# EAGLE board Biov4_LCD_v0_1_pan (EAGLE 7.5.0)
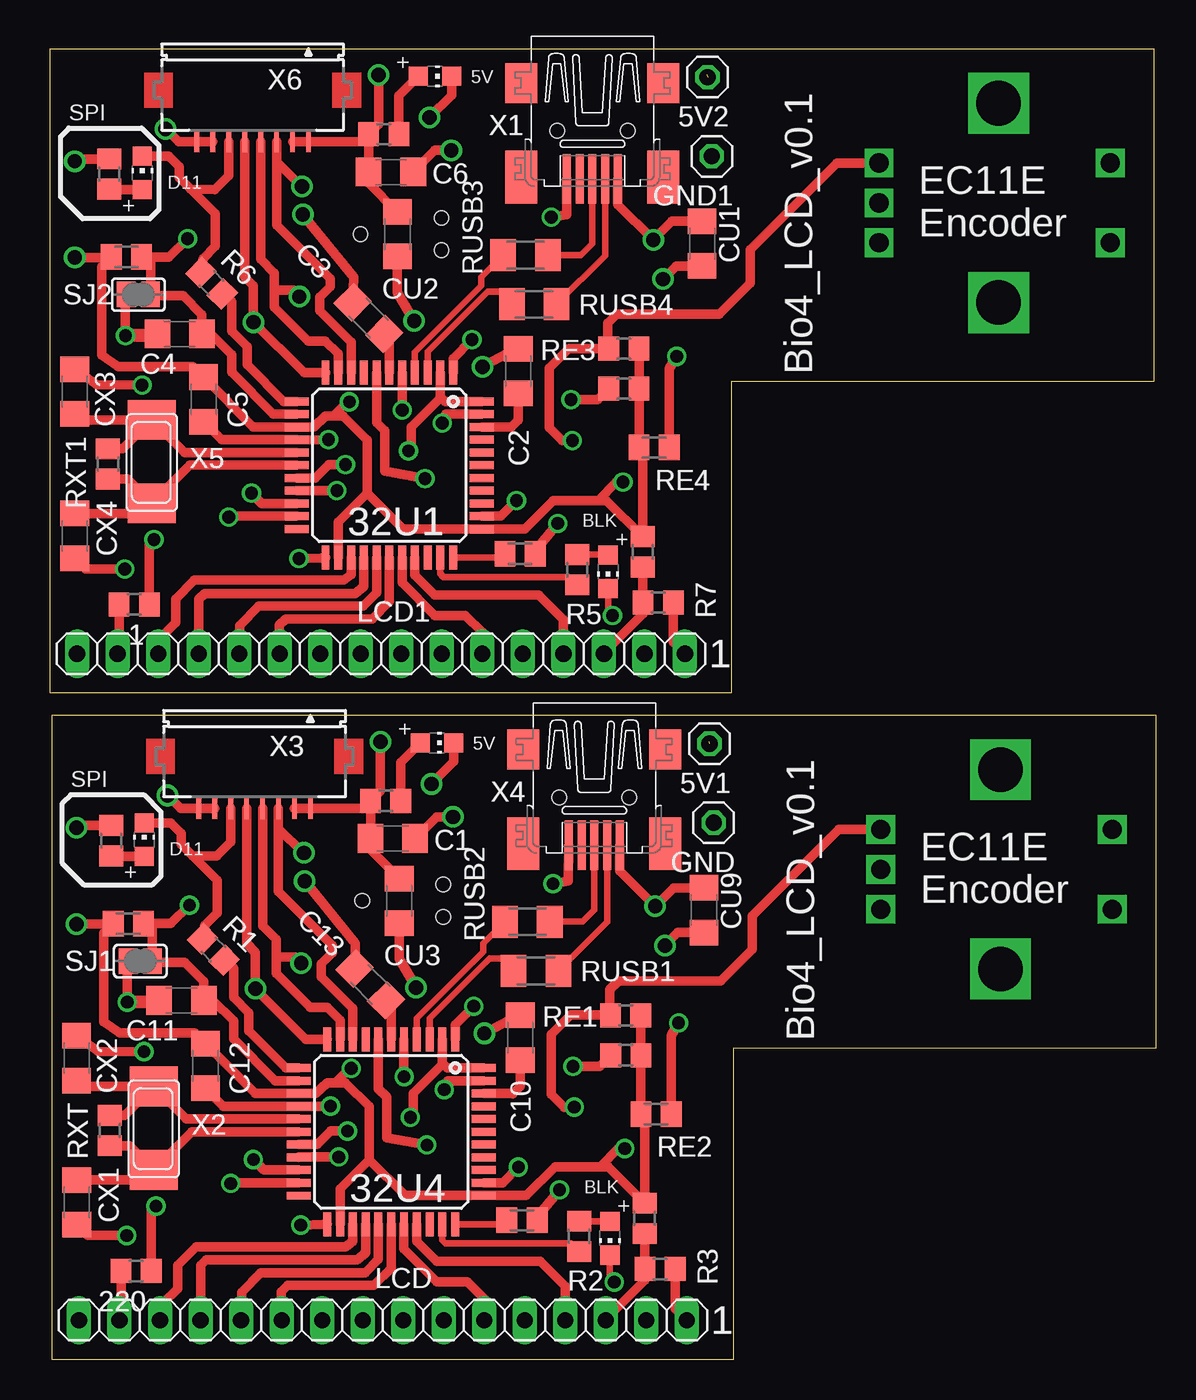
[diagram p0: board, top side]
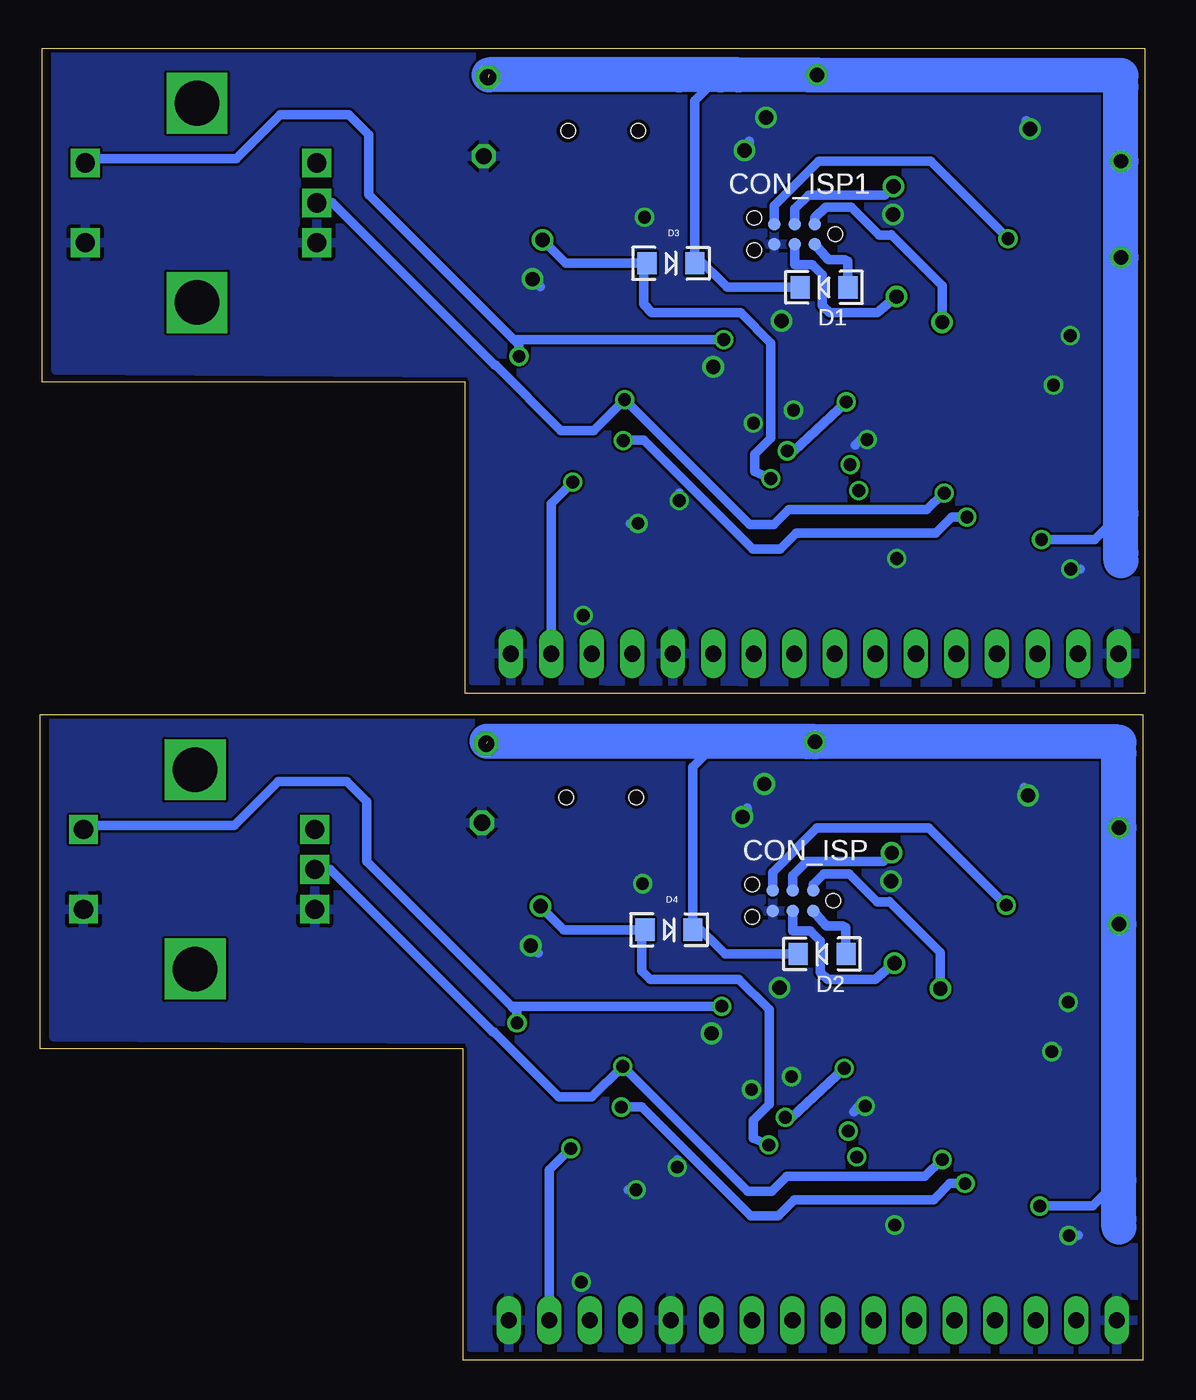
[diagram p1: board, bottom side, seen from below]

Size 69.27 x 82.2 mm. Coordinates in mm from the lower left corner, seen from the top.
Outline: 42.78,0 0.12,0 0.12,40.41 69.27,40.41 69.27,19.52 42.78,19.52 42.78,0
Outline: 42.66,41.79 0,41.79 0,82.2 69.15,82.2 69.15,61.31 42.66,61.31 42.66,41.79
Copper layers (1*2*15*16): Top 0.035mm / dielectric 0.2mm / layer 2 0.0175mm / dielectric 1.1mm / layer 15 0.0175mm / dielectric 0.2mm / Bottom 0.035mm
Design rules "SeeedStudio_DRU_no_angle_20130527": minimum track width 6mil, minimum drill 12mil, track to track 6mil, track to pad 6mil, pad to pad 6mil, via to via 6mil, smd to smd 0mil, copper to edge 10mil, drill to drill 10mil, minimum pad ring 6mil, minimum via ring 6mil, stop-mask expansion 2mil, vias tented up to drill 25mil, thermal gap 10mil
Net classes: 0 default: width 0.203 mm; 1 power: width 0.203 mm, drill 0.305 mm, clearance 0.152 mm; 2 VIN: width 0.457 mm; 3 fine: width 0.254 mm; 4 aref: width 0.356 mm
vRestrict: area 8.8,33.5 to 16.9,37.3; area 8.7,75.3 to 16.8,79.1

## Footprints (pad centres in the part's own frame; a part is rotated, then mirrored left to right if it is on the bottom)
R0805 = smd 1.3 x 1.5: 1 -0.95,0; 2 0.95,0
1X01 = drill 1.016 octagon: 1 0,0
TQFP44 = smd 1.5 x 0.5: 1 -5.8,4; 2 -5.8,3.2; 3 -5.8,2.4; 4 -5.8,1.6; 5 -5.8,0.8; 6 -5.8,0; 7 -5.8,-0.8; 8 -5.8,-1.6; 9 -5.8,-2.4; 10 -5.8,-3.2; 11 -5.8,-4; 23 5.8,-4; 24 5.8,-3.2; 25 5.8,-2.4; 26 5.8,-1.6; 27 5.8,-0.8; 28 5.8,0; 29 5.8,0.8; 30 5.8,1.6; 31 5.8,2.4; 32 5.8,3.2; 33 5.8,4 | smd 0.5 x 1.5: 12 -4,-5.8; 13 -3.2,-5.8; 14 -2.4,-5.8; 15 -1.6,-5.8; 16 -0.8,-5.8; 17 0,-5.8; 18 0.8,-5.8; 19 1.6,-5.8; 20 2.4,-5.8; 21 3.2,-5.8; 22 4,-5.8; 34 4,5.8; 35 3.2,5.8; 36 2.4,5.8; 37 1.6,5.8; 38 0.8,5.8; 39 0,5.8; 40 -0.8,5.8; 41 -1.6,5.8; 42 -2.4,5.8; 43 -3.2,5.8; 44 -4,5.8
CHIP-LED0805 = smd 1.2 x 1.2: A 0,-1.05; C 0,1.05
C1206 = smd 1.6 x 1.8: 1 -1.4,0; 2 1.4,0
TC2030-MCP-NL = smd 0.787 x 0.787: 5V 1.27,0.635; GND 3.81,0.635; MISO 1.27,-0.635; MOSI 2.54,0.635; RESET 3.81,-0.635; SCK 2.54,-0.635 | hole 0.889: 0,0; 5.08,-1.016; 5.08,1.016
LED-1206 = smd 1.2 x 1.4: A -1.5,0; C 1.5,0
1X16 = drill 1.016 long: 1 -19.05,0; 2 -16.51,0; 3 -13.97,0; 4 -11.43,0; 5 -8.89,0; 6 -6.35,0; 7 -3.81,0; 8 -1.27,0; 9 1.27,0; 10 3.81,0; 11 6.35,0; 12 8.89,0; 13 11.43,0; 14 13.97,0; 15 16.51,0; 16 19.05,0
M0805 = smd 1.3 x 1.6: 1 -0.95,0; 2 0.95,0
M1206 = smd 1.6 x 2: 1 -1.4,0; 2 1.4,0
SJ = smd 1.168 x 1.6: 1 -0.762,0; 2 0.762,0
EC11E = drill 1.2 square: A -2.5,0; B 0,0; C 2.5,0; D -2.5,14.5; E 2.5,14.5 | drill 2.8 square: P$1 6.25,7.5; P$2 -6.25,7.5
32005-201 = smd 3.1 x 0.5: 1 3,1.6; 2 3,0.8; 3 3,0; 4 3,-0.8; 5 3,-1.6 | smd 2.5 x 2: M1 -3,-4.45; M2 -3,4.45 | smd 3.3 x 2: M3 2.9,4.45; M4 2.9,-4.45 | hole 0.9: 0,2.2; 0,-2.2
NX6035 = smd 2.5 x 3: P$1 2.665,0; P$2 -2.565,0
FH12-08S-1SH = smd 0.3 x 1.3: 1 -3.5,3.25; 2 -2.5,3.25; 3 -1.5,3.25; 4 -0.5,3.25; 5 0.5,3.25; 6 1.5,3.25; 7 2.5,3.25; 8 3.5,3.25

## Placement (x,y rotation side)
1  220  [R0805]  5.25,47.35 180 top
5V1  [1X01]  41.3,38.61 180 top
5V2  [1X01]  41.19,80.4 180 top
32U1  ATMEGA32U4  [TQFP44]  21.24,56.07 270 top
32U4  ATMEGA32U4  [TQFP44]  21.36,14.29 270 top
220  220  [R0805]  5.37,5.56 180 top
BKLD  RED  [CHIP-LED0805]  35.07,7.61 180 top
BKLD1  RED  [CHIP-LED0805]  34.95,49.4 180 top
C1  100nF  [C1206]  21.46,32.67 0 top
C2  100nF  [C1206]  29.32,61.98 90 top
C3  100nF  [C1206]  19.93,65.3 315 top
C4  100nF  [C1206]  8.1,64.31 180 top
C5  100nF  [C1206]  9.6,60.2 90 top
C6  100nF  [C1206]  21.34,74.46 0 top
C10  100nF  [C1206]  29.44,20.19 90 top
C11  100nF  [C1206]  8.21,22.52 180 top
C12  100nF  [C1206]  9.72,18.41 90 top
C13  100nF  [C1206]  20.05,23.52 315 top
CON_ISP  SPI  [TC2030-MCP-NL]  19.55,28.78 180 bottom
CON_ISP1  SPI  [TC2030-MCP-NL]  19.43,70.57 180 bottom
CU1  10uF  [C1206]  40.84,69.97 90 top
CU2  10uF  [C1206]  21.75,70.55 270 top
CU3  10uF  [C1206]  21.87,28.76 270 top
CU9  10uF  [C1206]  40.96,28.18 90 top
CX1  22pF  [C1206]  1.65,9.86 90 top
CX2  22pF  [C1206]  1.64,18.9 270 top
CX3  22pF  [C1206]  1.52,60.69 270 top
CX4  22pF  [C1206]  1.53,51.65 90 top
D1  1N581D1206  [LED-1206]  20.12,67.23 180 bottom
D2  1N581D1206  [LED-1206]  20.24,25.44 180 bottom
D3  1N581D1206  [LED-1206]  29.73,68.74 0 bottom
D4  1N581D1206  [LED-1206]  29.85,26.95 0 bottom
GND  [1X01]  41.57,33.66 180 top
GND1  [1X01]  41.45,75.45 180 top
LCD  [1X16]  20.84,2.47 180 top
LCD1  [1X16]  20.72,44.26 180 top
LDPW1  RED  [CHIP-LED0805]  24.11,80.46 270 top
LDPW5  RED  [CHIP-LED0805]  24.23,38.67 270 top
LDSLAVE  RED  [CHIP-LED0805]  5.88,32.6 0 top
LDSLAVE1  RED  [CHIP-LED0805]  5.76,74.39 0 top
R1  1k  [R0805]  10.21,25.71 315 top
R2  1k  [R0805]  33.13,7.73 90 top
R3  1k  [R0805]  38.21,5.68 0 top
R4  1k  [R0805]  20.89,76.82 0 top
R5  1k  [R0805]  33.01,49.52 90 top
R6  1k  [R0805]  10.1,67.5 315 top
R7  1k  [R0805]  38.09,47.47 0 top
R13  1k  [R0805]  21.01,35.04 0 top
RE1  5k  [R0805]  36.05,21.59 180 top
RE2  5k  [R0805]  36.06,19.09 180 top
RE3  5k  [R0805]  35.93,63.38 180 top
RE4  5k  [R0805]  35.94,60.88 180 top
RK1  10k  [R0805]  37.24,8.86 270 top
RK2  10k  [M0805]  37.96,15.39 180 top
RK3  10k  [M0805]  29.43,50.53 180 top
RK4  10k  [M0805]  4.76,69.13 180 top
RK5  10k  [R0805]  3.69,74.32 270 top
RK6  10k  [M0805]  4.88,27.34 180 top
RK7  10k  [M0805]  29.55,8.74 180 top
RK8  10k  [R0805]  37.12,50.65 270 top
RK9  10k  [M0805]  37.84,57.18 180 top
RK18  10k  [R0805]  3.81,32.54 270 top
RUSB1  22  [M1206]  30.43,24.38 0 top
RUSB2  22  [M1206]  29.89,27.45 0 top
RUSB3  22  [M1206]  29.77,69.24 0 top
RUSB4  22  [M1206]  30.31,66.16 0 top
RXT  1M  [R0805]  3.72,14.37 270 top
RXT1  1M  [R0805]  3.6,56.15 270 top
SJ1  [SJ]  5.63,24.98 0 top
SJ2  [SJ]  5.51,66.77 0 top
U$1  EC11E  [EC11E]  52.04,30.74 270 top
U$2  EC11E  [EC11E]  51.92,72.52 270 top
X1  MINI-USB  [32005-201]  33.97,77.04 270 top
X2  16MHz  [NX6035]  6.48,14.46 90 top
X3  FH12-08S-1SH  [FH12-08S-1SH]  12.79,37.81 180 top
X4  MINI-USB  [32005-201]  34.09,35.25 270 top
X5  16MHz  [NX6035]  6.36,56.25 90 top
X6  FH12-08S-1SH  [FH12-08S-1SH]  12.67,79.59 180 top

## Library data of the parts
1 220 C1-C6 C10-C13 CU1-CU3 CU9 CX1-CX4 R1-R3 R5-R7 RE1-RE4 RK1 RK5 RK8 RK18 RXT RXT1 = rcl
5V1 5V2 GND GND1 = Headerlibrary
32U1 32U4 BKLD BKLD1 LDPW1 LDPW5 LDSLAVE LDSLAVE1 = adafruit
CON_ISP CON_ISP1 D1-D4 LCD LCD1 U$1 U$2 X2 X5 = lpatiny
R4 R13 RK2-RK4 RK6 RK7 RK9 RUSB1-RUSB4 = resistor
SJ1 SJ2 = jumper
X1 X4 = con-cypressindustries; OC_FARNELL: unknown; OC_NEWARK: unknown
X3 X6 = con-hirose; OC_FARNELL: unknown; OC_NEWARK: unknown

## Nets
+5V/1 [fine]: 5V1.1 32U4.2 32U4.14 32U4.24 32U4.34 32U4.44 220.1 C1.1 C12.2 CU3.1 D2.C D4.C LCD.2 R13.1 RE1.1 RE2.1 RK1.1 RK2.2 RK6.2 RK18.1 X3.1 X3.2
+5V/2 [fine]: 1.1 5V2.1 32U1.2 32U1.14 32U1.24 32U1.34 32U1.44 C5.2 C6.1 CU2.1 D1.C D3.C LCD1.2 R4.1 RE3.1 RE4.1 RK4.2 RK5.1 RK8.1 RK9.2 X6.1 X6.2
A0: 32U4.36
A1: 32U4.37
A2: 32U4.38
A3: 32U4.39
A4: 32U4.40
A5: 32U4.41
A6: 32U4.25 LCD.14
A7: 32U1.38
A8: 32U1.39
A9: 32U1.40
A10: 32U1.41
A11: 32U1.37
A12: 32U1.36
A13: 32U1.25 LCD1.14
AREF: 32U4.42 C10.1
AREF1: 32U1.42 C2.1
CS_32U1: LDSLAVE1.C R6.1 X6.6
CS_32U4: LDSLAVE.C R1.1 X3.6
D5*: 32U4.31
D5*1: 32U1.31
D6*: 32U4.27 LCD.12
D6*1: 32U1.27 LCD1.12
D7*: 32U4.1 RK2.1 U$1.D
D7*1: 32U1.1 RK9.1 U$2.D
D8*: 32U4.28 LCD.11
D8*1: 32U1.28 LCD1.11
D9*: 32U4.29 LCD.6
D9*1: 32U1.29 LCD1.6
D10*: 32U4.30 LCD.4
D10*1: 32U1.30 LCD1.4
D11*: 32U4.12 R1.2
D11*1: 32U1.12 R6.2
D12*: 32U4.26 LCD.13
D12*1: 32U1.26 LCD1.13
D13*: 32U4.32 R2.1
D13*1: 32U1.32 R5.1
GND [power]: 32U4.5 32U4.15 32U4.23 32U4.35 32U4.43 BKLD.C C1.2 C10.2 C11.2 C12.1 C13.1 CON_ISP.GND CU3.2 CU9.1 CX1.1 CX2.1 GND.1 LCD.1 LCD.5 LCD.16 LDPW5.C R3.2 RK7.1 SJ1.1 U$1.C U$1.E X3.7 X3.8 X4.5
GND1 [power]: 32U1.5 32U1.15 32U1.23 32U1.35 32U1.43 BKLD1.C C2.2 C3.1 C4.2 C5.1 C6.2 CON_ISP1.GND CU1.1 CU2.2 CX3.1 CX4.1 GND1.1 LCD1.1 LCD1.5 LCD1.16 LDPW1.C R7.2 RK3.1 SJ2.1 U$2.C U$2.E X1.5 X6.7 X6.8
HWB: 32U4.33 RK7.2
HWB1: 32U1.33 RK3.2
ISP+5V: CON_ISP.5V D2.A
ISP+5V1: CON_ISP1.5V D1.A
MISO: 32U4.11 CON_ISP.MISO X3.5
MISO1: 32U1.11 CON_ISP1.MISO X6.5
MOSI: 32U4.10 CON_ISP.MOSI X3.4
MOSI1: 32U1.10 CON_ISP1.MOSI X6.4
N$1: 32U4.6 C13.2
N$2: LCD.3 R3.1 RK1.2
N$3: BKLD.A R2.2
N$4: LDPW1.A R4.2
N$5: BKLD1.A R5.2
N$6: 32U1.17 CX4.2 RXT1.2 X5.P$2
N$7: 32U1.6 C3.2
N$8: LDSLAVE1.A RK5.2
N$9: LCD1.3 R7.1 RK8.2
N$10: 1.2 LCD1.15
N$11: 220.2 LCD.15
N$12: LDPW5.A R13.2
N$22: LDSLAVE.A RK18.2
N$42: 32U4.17 CX1.2 RXT.2 X2.P$2
RESET: 32U4.13 C11.1 CON_ISP.RESET RK6.1 SJ1.2
RESET1: 32U1.13 C4.1 CON_ISP1.RESET RK4.1 SJ2.2
RX: 32U4.20 RE2.2 U$1.B
RX1: 32U1.20 RE4.2 U$2.B
RXLED: 32U4.8
RXLED1: 32U1.8
SCK: 32U4.9 CON_ISP.SCK X3.3
SCK1: 32U1.9 CON_ISP1.SCK X6.3
SCL: 32U4.18
SCL1: 32U1.18
SDA: 32U4.19
SDA1: 32U1.19
TX: 32U4.21 RE1.2 U$1.A
TX1: 32U1.21 RE3.2 U$2.A
TXLED: 32U4.22
TXLED1: 32U1.22
USB_N: 32U4.3 RUSB1.1
USB_N1: 32U1.3 RUSB4.1
USB_P: 32U4.4 RUSB2.1
USB_P1: 32U1.4 RUSB3.1
USBC_N: RUSB1.2 X4.2
USBC_N1: RUSB4.2 X1.2
USBC_P: RUSB2.2 X4.3
USBC_P1: RUSB3.2 X1.3
VUSB: 32U4.7 CU9.2 D4.A X4.1
VUSB1: 32U1.7 CU1.2 D3.A X1.1
XTAL1: 32U4.16 CX2.2 RXT.1 X2.P$1
XTAL2: 32U1.16 CX3.2 RXT1.1 X5.P$1

## Tracks (layer width: path | path; a pad name or v marks a point on that pad's centre or on a via)
+5V/1  (via drill 0.8, 0.8 pad 0.81, 0.9, 0.9 pad 0.61)  (1 unrouted)
  Top 0.61: 32U4.24 18.16,10.72 19.97,12.54 | 19.97,12.54 19.97,15.86 18.48,17.35 17.85,17.35 | 17.85,17.35 17.34,17.35 16.63,16.69 15.57,16.69 32U4.14 12.84,16.69 C12.2 9.05,20.48 4.35,20.48 3.33,21.18 3.33,26.74 3.89,27.3 | 19.97,12.54 22.22,10.29 32U4.34 29.83,10.29 31.63,12.09 34.45,12.09 | 32U4.44 24.87,18.29 24.56,18.6 | 32U4.2 24.56,18.6 | 24.56,18.6 24.56,18.5 22.74,16.68 22.74,15.37 v22.56,15.19 | v18.86,18.26 18.86,18.36 17.85,17.35 | RK6.2 3.89,27.3 | 3.89,27.3 v1.64,27.3 | X3.2 X3.1 19.58,34.56 R13.1 | RK18.1 1.78,33.49 v1.64,33.35 | R13.1 20.68,35.66 v20.68,38.75 | R13.1 C1.1 20.06,31.97 CU3.1 | 34.45,12.09 34.96,12.09 RK1.1 | 220.1 6.32,9.34 v6.61,9.63 | RE1.1 RE2.1 RK2.2 37.24,15.16 RK1.1 | 37.01,10.04 RK1.1 | v36,13.23 35.59,13.23 34.45,12.09
  Bottom 0.61: v22.56,15.19 22.16,15.19 v18.86,18.26 | 1.64,38 1.64,38.35 2,38.71 | v20.68,38.75 v20.69,38.75 21.18,38.75 | v6.61,9.63 3.27,9.63 1.64,11.26 | LCD.2 37.35,11.88 v36,13.23 | D4.C 28.35,27.46 | 28.35,27.46 28.35,37.14 26.73,38.76 | D2.C 26.33,25.44 28.35,27.46
  Bottom 2.184: 1.64,8.31 1.64,8.8 1.64,11.26 v1.64,27.3 v1.64,33.35 1.64,38 1.64,38.71 2,38.71 v20.68,38.75 21.18,38.75 25.61,38.76 26.73,38.76 29.33,38.76 35,38.77 41.25,38.77
+5V/2  (via drill 0.8, 0.8 pad 0.81, 0.9, 0.9 pad 0.61)  (1 unrouted)
  Top 0.61: 32U1.24 18.04,52.51 19.85,54.33 | 19.85,54.33 19.85,57.65 18.36,59.14 17.73,59.14 | 17.73,59.14 17.22,59.14 16.51,58.48 15.45,58.48 32U1.14 12.73,58.47 C5.2 8.93,62.27 4.23,62.27 3.21,62.97 3.21,68.53 3.78,69.09 | 19.85,54.33 22.1,52.07 32U1.34 29.71,52.07 31.51,53.87 34.33,53.87 | 32U1.44 24.76,60.07 24.44,60.39 | 32U1.2 24.44,60.39 | 24.44,60.39 24.44,60.29 22.62,58.47 22.62,57.16 v22.44,56.97 | v18.74,60.05 18.74,60.15 17.73,59.14 | RK4.2 3.78,69.09 | 3.78,69.09 v1.52,69.09 | X6.2 X6.1 19.46,76.34 R4.1 | RK5.1 1.66,75.27 v1.52,75.13 | R4.1 20.56,77.45 v20.56,80.54 | R4.1 C6.1 19.94,73.76 CU2.1 | 34.33,53.87 34.84,53.87 RK8.1 | 1.1 6.2,51.13 v6.49,51.42 | RE3.1 RE4.1 RK9.2 37.12,56.95 RK8.1 | 36.89,51.82 RK8.1 | v35.88,55.02 35.47,55.02 34.33,53.87
  Bottom 0.61: v22.44,56.97 22.04,56.97 v18.74,60.05 | 1.52,79.79 1.52,80.14 1.88,80.5 | v20.56,80.54 v20.57,80.54 21.06,80.54 | v6.49,51.42 3.15,51.42 1.52,53.05 | LCD1.2 37.23,53.67 v35.88,55.02 | D3.C 28.23,69.25 | 28.23,69.25 28.23,78.93 26.61,80.55 | D1.C 26.21,67.23 28.23,69.25
  Bottom 2.184: 1.52,50.1 1.52,50.59 1.52,53.05 v1.52,69.09 v1.52,75.13 1.52,79.79 1.52,80.5 1.88,80.5 v20.56,80.54 21.06,80.54 25.49,80.55 26.61,80.55 29.21,80.55 34.88,80.56 41.13,80.56
A6
  Top 0.61: 32U4.25 18.96,7.42 18.49,7.07 9.14,7.07 7.97,5.91 7.97,4.44 7.05,3.52 7.05,2.32 LCD.14
A13
  Top 0.61: 32U1.25 18.84,49.21 18.37,48.86 9.02,48.86 7.85,47.7 7.85,46.22 6.93,45.31 6.93,44.11 LCD1.14
AREF
  Top 0.61: 32U4.42 28.97,16.69 28.99,16.67 29.44,17.13 C10.1
AREF1
  Top 0.61: 32U1.42 28.86,58.47 28.87,58.46 29.32,58.92 C2.1
CS_32U1
  Top 0.61: 8.8,73.38 10.29,73.36 11.17,74.24 X6.6 | LDSLAVE1.C 7.43,75.44 8.09,74.78 8.09,74.09 8.8,73.38 | R6.1 9.56,69.03 10.34,69.8 10.34,71.84 8.8,73.38
CS_32U4
  Top 0.61: 8.92,31.59 10.41,31.57 11.29,32.45 X3.6 | LDSLAVE.C 7.55,33.65 8.21,32.99 8.21,32.3 8.92,31.59 | R1.1 9.68,27.24 10.46,28.01 10.46,30.05 8.92,31.59
D6*
  Top 0.61: 32U4.27 20.56,6.29 19.72,5.45 13.19,5.45 11.97,4.24 11.97,2.18 LCD.12
D6*1
  Top 0.61: 32U1.27 20.44,48.08 19.6,47.24 13.07,47.24 11.86,46.03 11.86,43.97 LCD1.12
D7*  (via drill 0.8)
  Top 0.61: 32U4.1 25.36,20.98 v26.54,22.16 | RK2.1 38.91,20.34 v39.37,21.11
  Bottom 0.61: v26.54,22.16 39.7,22.16 | 39.7,22.16 48.78,31.24 48.78,35.01 50.04,36.26 54.34,36.26 57.1,33.5 66.28,33.5 U$1.D | v39.37,21.11 39.39,21.85 39.7,22.16
D7*1  (via drill 0.8)
  Top 0.61: 32U1.1 25.24,62.77 v26.42,63.95 | RK9.1 38.79,62.13 v39.25,62.9
  Bottom 0.61: v26.42,63.95 39.58,63.95 | 39.58,63.95 48.66,73.03 48.66,76.79 49.92,78.05 54.22,78.05 56.98,75.29 66.16,75.29 U$2.D | v39.25,62.9 39.27,63.64 39.58,63.95
D8*
  Top 0.61: 32U4.28 21.36,5.73 20.28,4.65 14.87,4.65 14.47,4.25 14.47,2.49 LCD.11
D8*1
  Top 0.61: 32U1.28 21.24,47.52 20.16,46.44 14.75,46.44 14.35,46.04 14.35,44.28 LCD1.11
D9*
  Top 0.61: 32U4.29 22.16,6.94 24.22,4.88 26.12,4.88 27.21,3.79 27.21,2.49 LCD.6
D9*1
  Top 0.61: 32U1.29 22.04,48.73 24.1,46.67 26,46.67 27.09,45.58 27.09,44.28 LCD1.6
D10*
  Top 0.61: 32U4.30 22.96,7.4 24.2,6.16 30.71,6.16 32.26,4.61 32.26,2.48 LCD.4
D10*1
  Top 0.61: 32U1.30 22.84,49.19 24.08,47.95 30.59,47.95 32.14,46.4 LCD1.4
D11*
  Top 0.61: 32U4.12 14.75,18.29 12.44,20.6 12.44,21.73 11.47,22.7 11.47,24.54 R1.2
D11*1
  Top 0.61: 32U1.12 14.63,60.07 12.32,62.39 12.32,63.52 11.35,64.49 11.35,66.33 R6.2
D12*
  Top 0.61: 32U4.26 19.76,6.68 19.24,6.25 11.8,6.26 9.78,6.26 9.43,5.91 LCD.13
D12*1
  Top 0.61: 32U1.26 19.64,48.47 19.12,48.04 11.68,48.05 9.66,48.05 9.31,47.69 LCD1.13
D13*
  Top 0.406: 32U4.32 24.56,7.49 24.74,7.28 32.6,7.28 R2.1
D13*1
  Top 0.406: 32U1.32 24.44,49.28 24.62,49.07 32.48,49.07 R5.1
GND  (via drill 0.8, 0.8 pad 0.81, 0.9, 0.9 pad 0.61, 0.9 pad 0.81)
  Top 0.406: BKLD.C 35.07,5.15 v35.34,4.87
  Top 0.61: v17.55,15.9 17.47,15.87 32U4.15 10.84,15.89 C12.1 | 32U4.5 22.16,18.36 v22.16,17.74 | CX2.1 3.01,19.34 v5.86,19.31 | 32U4.23 17.09,8.48 v15.69,8.43 | v4.78,7.78 2.33,7.78 CX1.1 | 32U4.43 24.9,17.49 v24.67,16.93 | C10.2 29.45,21.65 v27.19,20.45 | X3.7 X3.8 8.16,34.56 v7.34,35.37 | SJ1.1 4.82,24.93 v4.82,22.41 | LDPW5.C 25.28,37.5 v23.87,36.09 | C13.1 19.11,26.09 v15.93,30 | C1.2 24.21,34.02 v25.24,34.02 | CU3.2 21.87,25.12 v22.92,23.32 | X4.5 32.47,30 v31.5,29.84 | CU9.1 39.33,26.78 v38.51,25.96 | 32U4.35 28.34,11.09 v29.33,12.08 | RK7.1 30.68,9.13 v31.91,10.64 | LCD.1 39.16,3.2 R3.2
  Top 0.813: C11.2 6.66,22.42 v4.82,22.41
  Bottom 0.406: v35.34,4.87 35.34,4.95 35.46,5.07
  Bottom 0.61: v17.55,15.9 17.94,15.88 18.28,15.55 | v4.78,7.78 4.19,7.78 | v5.86,19.31 5.66,19.32 5.52,19.46 | v7.34,35.37 7.34,35.64 7.58,35.88 | v23.87,36.09 24.01,36.09 24.03,36.11 | v25.24,34.02 24.93,34.34 24.93,34.59 | v22.92,23.32 23.19,23.53 23.09,23.29 | v38.51,25.96 | v38.51,25.96 38.04,25.48 | v29.33,12.08 29.33,12.54 | v31.91,10.64 32.39,10.64
  pour Bottom: 0.56,39.86 0.52,39.89 0.79,0.63 42.29,0.79 42.29,20.07 68.4,20.25 68.4,40.15 1.82,40.25 0.8,40.13
GND1  (via drill 0.8, 0.8 pad 0.81, 0.9, 0.9 pad 0.61, 0.9 pad 0.81)
  Top 0.406: BKLD1.C 34.95,46.93 v35.22,46.66
  Top 0.61: v17.43,57.68 17.35,57.66 32U1.15 10.73,57.67 C5.1 | 32U1.5 22.04,60.15 v22.05,59.53 | CX3.1 2.89,61.13 v5.74,61.09 | 32U1.23 16.97,50.27 v15.58,50.22 | v4.66,49.57 2.21,49.57 CX4.1 | 32U1.43 24.78,59.27 v24.55,58.72 | C2.2 29.33,63.44 v27.07,62.24 | X6.7 X6.8 8.04,76.34 v7.22,77.16 | SJ2.1 4.7,66.72 v4.7,64.2 | LDPW1.C 25.16,79.29 v23.75,77.88 | C3.1 18.99,67.88 v15.81,71.79 | C6.2 24.09,75.81 v25.12,75.81 | CU2.2 21.75,66.9 v22.8,65.11 | X1.5 32.35,71.79 v31.38,71.63 | CU1.1 39.21,68.57 v38.39,67.74 | 32U1.35 28.22,52.87 v29.21,53.86 | RK3.1 30.56,50.92 v31.79,52.43 | LCD1.1 39.04,44.98 R7.2
  Top 0.813: C4.2 6.54,64.21 v4.7,64.2
  Bottom 0.406: v35.22,46.66 35.22,46.74 35.34,46.86
  Bottom 0.61: v17.43,57.68 17.82,57.67 18.16,57.34 | v4.66,49.57 4.07,49.57 | v5.74,61.09 5.54,61.11 5.4,61.25 | v7.22,77.16 7.22,77.43 7.46,77.67 | v23.75,77.88 23.89,77.88 23.91,77.9 | v25.12,75.81 24.81,76.13 24.81,76.38 | v22.8,65.11 23.07,65.32 22.97,65.08 | v38.39,67.74 37.92,67.27 | v29.21,53.86 29.21,54.33 | v31.79,52.43 32.27,52.43
  pour Bottom: 0.44,81.65 0.4,81.68 0.67,42.42 42.17,42.58 42.17,61.85 68.28,62.04 68.28,81.94 1.7,82.04 0.68,81.91
HWB
  Top 0.406: 32U4.33 28.35,8.49 RK7.2
HWB1
  Top 0.406: 32U1.33 28.23,50.27 RK3.2
ISP+5V
  Bottom 0.61: CON_ISP.5V 19.99,27.19 18.94,27.19 18.76,27.08 18.76,25.46 D2.A
ISP+5V1
  Bottom 0.61: CON_ISP1.5V 19.87,68.98 18.83,68.98 18.64,68.87 18.64,67.25 D1.A
MISO  (via drill 0.9 pad 0.61)
  Top 0.61: 32U4.11 16.01,20.09 v12.84,23.25 12.84,25.54 12.29,26.09 X3.5
  Bottom 0.61: v12.84,23.25 12.84,25.54 16.04,28.74 16.08,28.7 16.79,28.7 18.55,30.46 20.15,30.46 20.82,29.79 CON_ISP.MISO
MISO1  (via drill 0.9 pad 0.61)
  Top 0.61: 32U1.11 15.89,61.87 v12.72,65.04 12.72,67.33 12.17,67.88 X6.5
  Bottom 0.61: v12.72,65.04 12.72,67.33 15.92,70.53 15.96,70.49 16.67,70.49 18.44,72.25 20.03,72.25 20.7,71.58 CON_ISP1.MISO
MOSI  (via drill 0.9 pad 0.61)
  Top 0.61: 32U4.10 18.16,21.27 17.35,22.08 16.29,22.08 14.16,24.21 14.16,25.26 | 14.16,25.26 14.16,26.34 13.29,27.21 X3.4 | v15.72,24.86 15.36,25.26 14.16,25.26
  Bottom 0.61: v15.72,24.86 16.91,23.85 19.9,23.85 20.27,24.19 20.36,24.28 20.36,26.24 20.99,26.86 22.09,26.86 CON_ISP.MOSI
MOSI1  (via drill 0.9 pad 0.61)
  Top 0.61: 32U1.10 18.04,63.06 17.23,63.87 16.17,63.87 14.04,66 14.04,67.05 | 14.04,67.05 14.04,68.13 13.17,69 X6.4 | v15.6,66.65 15.24,67.05 14.04,67.05
  Bottom 0.61: v15.6,66.65 16.79,65.64 19.78,65.64 20.16,65.98 20.24,66.07 20.24,68.03 20.87,68.65 21.97,68.65 CON_ISP1.MOSI
N$1
  Top 0.61: 32U4.6 21.36,22.14 C13.2
N$2
  Top 0.61: LCD.3 34.81,2.53 37.26,4.98 R3.1 37.24,5.71 RK1.2
N$3
  Top 0.406: R2.2 35.05,8.68 BKLD.A
N$4
  Top 0.61: R4.2 21.84,79.24 LDPW1.A
N$5
  Top 0.406: R5.2 34.93,50.47 BKLD1.A
N$6
  Top 0.61: 32U1.17 8.75,56.07 X5.P$2 | CX4.2 6.37,53.05 6.96,53.64 6.41,53.64 X5.P$2 | RXT1.2 4.84,55.2 X5.P$2
N$7
  Top 0.61: 32U1.6 21.24,63.93 C3.2
N$8
  Top 0.61: LDSLAVE1.A 3.72,73.34 RK5.2
N$9
  Top 0.61: LCD1.3 34.69,44.31 37.14,46.77 R7.1 37.12,47.5 RK8.2
N$10
  Top 0.61: 1.2 4.3,44.02 LCD1.15
N$11
  Top 0.61: 220.2 4.42,2.23 LCD.15
N$12
  Top 0.61: R13.2 21.96,37.45 LDPW5.A
N$22
  Top 0.61: LDSLAVE.A 3.84,31.55 RK18.2
N$42
  Top 0.61: 32U4.17 8.87,14.29 X2.P$2 | CX1.2 6.49,11.26 7.08,11.85 6.53,11.85 X2.P$2 | RXT.2 4.96,13.42 X2.P$2
RESET  (via drill 0.8 pad 0.81)
  Top 0.61: 32U4.13 14.1,17.49 11.47,20.11 11.47,21.23 10.17,22.53 9.63,22.53 C11.1 | 9.74,22.39 C11.1 | C11.1 9.61,23.72 8.43,24.9 6.47,24.9 SJ1.2 6.39,27.34 RK6.1 7.54,27.34 v8.71,28.49
  Bottom 0.61: CON_ISP.RESET 23.36,30.55 20.57,33.34 13.56,33.34 v8.71,28.49
RESET1  (via drill 0.8 pad 0.81)
  Top 0.61: 32U1.13 13.98,59.27 11.35,61.9 11.35,63.02 10.05,64.32 9.51,64.32 C4.1 | 9.62,64.18 C4.1 | C4.1 9.49,65.51 8.31,66.69 6.35,66.69 SJ2.2 6.27,69.13 RK4.1 7.42,69.13 v8.59,70.28
  Bottom 0.61: CON_ISP1.RESET 23.24,72.34 20.45,75.13 13.44,75.13 v8.59,70.28
RX  (via drill 0.8)
  Top 0.61: 32U4.20 13.38,11.89 v12.72,12.54 | v32.75,18.39 34.42,18.39 RE2.2
  Bottom 0.61: v12.72,12.54 12.76,12.54 13.8,11.5 22.47,11.5 23.41,10.56 24.91,10.56 v32.75,18.39 34.67,16.47 36.75,16.47 40.83,20.55 40.88,20.55 51.07,30.74 U$1.B
RX1  (via drill 0.8)
  Top 0.61: 32U1.20 13.26,53.67 v12.6,54.33 | v32.63,60.18 34.3,60.18 RE4.2
  Bottom 0.61: v12.6,54.33 12.64,54.33 13.68,53.28 22.35,53.28 23.29,52.34 24.79,52.34 v32.63,60.18 34.55,58.26 36.63,58.26 40.71,62.34 40.76,62.34 50.95,72.52 U$2.B
SCK  (via drill 0.9 pad 0.61)
  Top 0.61: 32U4.9 18.96,22.02 16.99,23.99 16.99,24.81 17.66,25.49 17.66,25.98 14.29,29.35 14.29,33.31 | X3.3 14.29,33.31 | v15.89,31.77 15.83,31.77 14.29,33.31
  Bottom 0.61: v15.89,31.77 16.43,31.23 21.21,31.23 22.08,30.36 22.08,29.42 CON_ISP.SCK
SCK1  (via drill 0.9 pad 0.61)
  Top 0.61: 32U1.9 18.84,63.81 16.87,65.78 16.87,66.6 17.54,67.28 17.54,67.77 14.17,71.14 14.17,75.1 | X6.3 14.17,75.1 | v15.77,73.56 15.72,73.56 14.17,75.1
  Bottom 0.61: v15.77,73.56 16.31,73.02 21.09,73.02 21.96,72.15 21.96,71.21 CON_ISP1.SCK
SCL  (via drill 0.8 pad 0.81)
  Top 0.61: v18.61,14.33 17.56,14.33 16.73,13.49 15.57,13.49 32U4.18
  Bottom 0.61: v18.61,14.33 18.61,14.16
SCL1  (via drill 0.8 pad 0.81)
  Top 0.61: v18.5,56.12 17.44,56.12 16.61,55.27 15.45,55.27 32U1.18
  Bottom 0.61: v18.5,56.12 18.5,55.95
SDA  (via drill 0.8 pad 0.81)
  Top 0.61: v18.07,12.7 15.58,12.7 32U4.19
  Bottom 0.61: v18.07,12.7 18.11,12.7
SDA1  (via drill 0.8 pad 0.81)
  Top 0.61: v17.95,54.49 15.46,54.49 32U1.19
  Bottom 0.61: v17.95,54.49 17.99,54.49
TX  (via drill 0.8)
  Top 0.61: 32U4.21 11.34,11.09 v11.29,11.04 | v32.83,15.83 32.2,15.83 31.38,16.64 31.38,20.39 32.6,21.61 35.09,21.61 RE1.2 35.06,21.63 35.06,23.21 35.61,23.75 42.02,23.75 43.97,25.7 43.97,27.8 49.4,33.24 U$1.A
  Bottom 0.61: v11.29,11.04 12.23,11.04 13.24,10.03 21.99,10.03 23,9.02 24.72,9.02 31.56,15.86 32.8,15.86 v32.83,15.83
TX1  (via drill 0.8)
  Top 0.61: 32U1.21 11.22,52.87 v11.17,52.83 | v32.71,57.62 32.08,57.62 31.26,58.43 31.26,62.18 32.48,63.39 34.97,63.39 RE3.2 34.94,63.42 34.94,65 35.49,65.54 41.9,65.54 43.85,67.49 43.85,69.59 49.28,75.02 U$2.A
  Bottom 0.61: v11.17,52.83 12.11,52.83 13.12,51.82 21.87,51.82 22.88,50.81 24.6,50.81 31.44,57.65 32.69,57.65 v32.71,57.62
USB_N
  Top 0.406: 32U4.3 23.76,21.39 27.53,25.16 28.24,25.16 RUSB1.1
USB_N1
  Top 0.406: 32U1.3 23.64,63.18 27.41,66.95 28.12,66.95 RUSB4.1
USB_P
  Top 0.406: 32U4.4 22.96,21.39 27.13,25.56 27.13,26.09 RUSB2.1
USB_P1
  Top 0.406: 32U1.4 22.84,63.17 27.01,67.35 27.01,67.88 RUSB3.1
USBC_N
  Top 0.406: X4.2 34.89,27.43 RUSB1.2
USBC_N1
  Top 0.406: X1.2 34.77,69.22 RUSB4.2
USBC_P
  Top 0.406: X4.3 34.09,28.19 33.37,27.47 31.31,27.47 RUSB2.2
USBC_P1
  Top 0.406: X1.3 33.97,69.98 33.25,69.26 31.19,69.26 RUSB3.2
VUSB  (via drill 0.8 pad 0.81, 0.9)
  Top 0.61: 32U4.7 20.56,16.97 21.06,16.46 21.06,13.91 v23.59,13.46 | X4.1 35.69,30.64 v37.9,28.42 39.06,29.58 CU9.2
  Bottom 0.61: 23.59,13.38 v23.59,13.46 24.58,13.88 24.58,14.99 23.57,15.99 23.57,21.95 25.48,23.85 31.03,23.85 31.56,24.38 31.56,26.74 D4.A | D4.A 36.43,26.95 v37.9,28.42 | D4.A 31.35,26.88
VUSB1  (via drill 0.8 pad 0.81, 0.9)
  Top 0.61: 32U1.7 20.44,58.76 20.94,58.25 20.94,55.7 v23.47,55.24 | X1.1 35.57,72.43 v37.78,70.21 38.94,71.37 CU1.2
  Bottom 0.61: 23.47,55.17 v23.47,55.24 24.46,55.67 24.46,56.78 23.45,57.78 23.45,63.74 25.36,65.64 30.91,65.64 31.44,66.17 31.44,68.53 D3.A | D3.A 36.31,68.74 v37.78,70.21 | D3.A 31.23,68.67
XTAL1
  Top 0.61: 32U4.16 8.52,15.09 X2.P$1 | X2.P$1 2.01,17.13 CX2.2 | RXT.1 4.67,15.32 X2.P$1
XTAL2
  Top 0.61: 32U1.16 8.4,56.87 X5.P$1 | X5.P$1 1.89,58.92 CX3.2 | RXT1.1 4.55,57.1 X5.P$1

## Text on the board
tNames: 5V | SPI | D11 | EC11E / Encoder | Bio4_LCD_v0.1 | BLK | 1 | 5V | SPI | D11 | EC11E / Encoder | Bio4_LCD_v0.1 | BLK | 1
tValues: Screen | PID
_tNames: X6 | 5V2 | X1 | C6 | GND1 | R6 | C3 | CU1 | RUSB3 | SJ2 | CU2 | RUSB4 | RE3 | C4 | CX3 | RXT1 | C5 | X5 | C2 | RE4 | 32U1 | CX4 | LCD1 | R5 | 1 | R7 | X3 | 5V1 | X4 | C1 | GND | R1 | C13 | CU9 | SJ1 | RUSB2 | CU3 | RUSB1 | RE1 | C11 | CX2 | C12 | RXT | X2 | C10 | RE2 | 32U4 | CX1 | LCD | R2 | R3 | 220
_bNames: CON_ISP1 | D3 | D1 | CON_ISP | D4 | D2
_tValues: 220
203bmp: C:/Users/G/Pictures/logo_epfl.bmp